# Altium PCB battery level meter.PcbDoc
Units mm, origin at the board's own origin, x right, y up, seen from the top; angles counter-clockwise.
Board outline 48.64 x 87.12 mm, 2 copper layers (Top Layer, Bottom Layer); 17 components, 17 nets, 51 pads, 0 vias.
Unrouted connection lines stored in the file: 2.
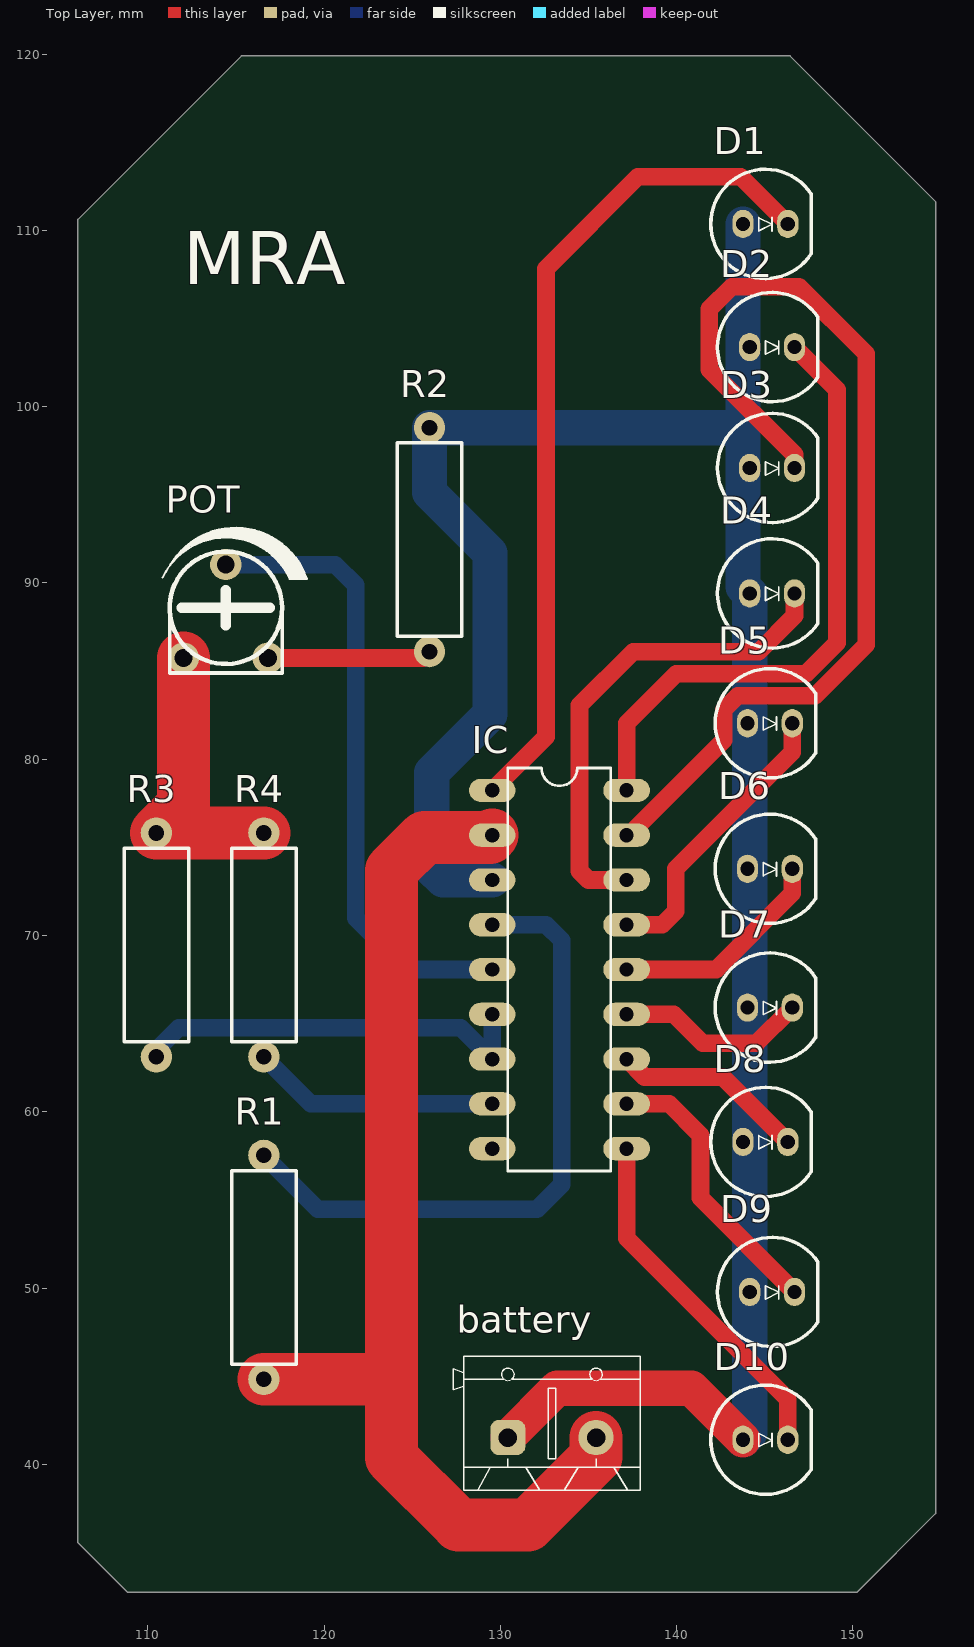
[diagram p0: Top Layer view]
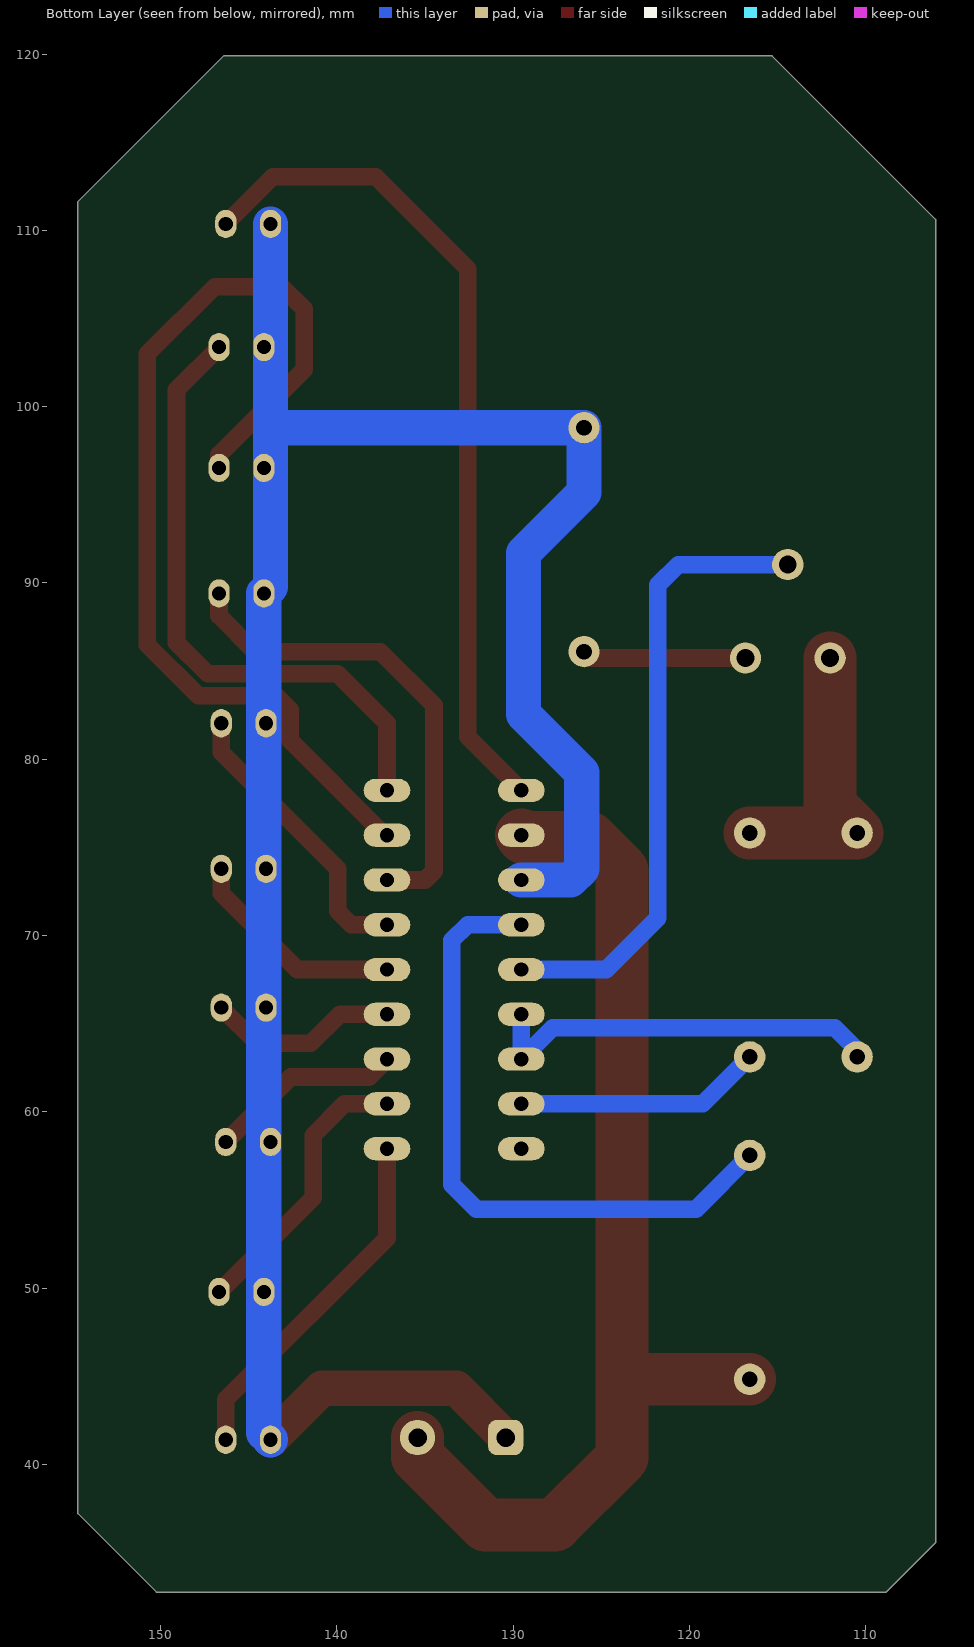
[diagram p1: Bottom Layer view, seen from below]
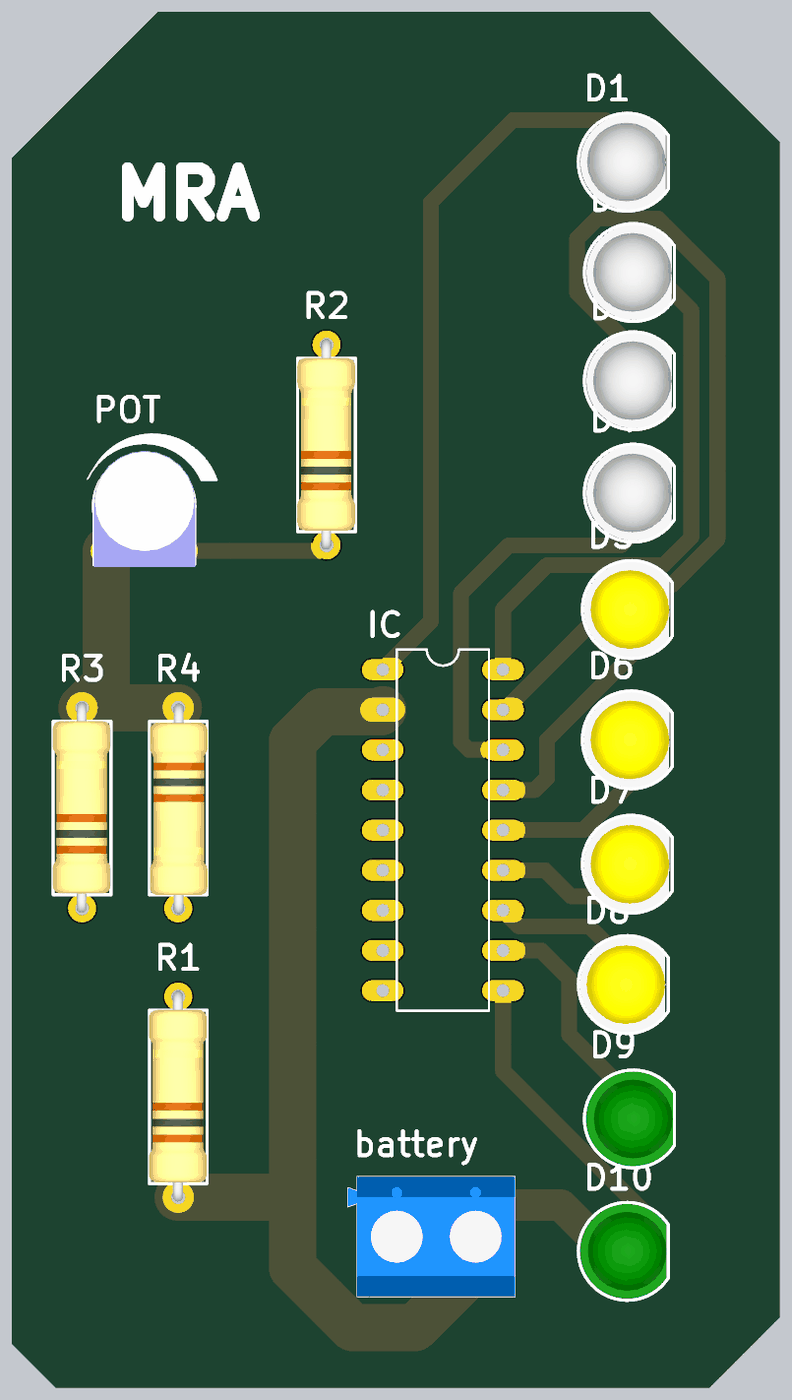
[diagram p2: 3D render of the assembled board from above, using the file's embedded part models]

## Layer stack, top to bottom
Top Solder: solder mask 0.0102, Solder Resist, Dk 3.5
Top Layer: signal copper 0.0356
Dielectric 1: dielectric 0.32, FR-4, Dk 4.8
Bottom Layer: signal copper 0.0356
Bottom Solder: solder mask 0.0102, Solder Resist, Dk 3.5

## Board outline
106.045,35.56 108.839,32.766 150.241,32.766 154.686,37.211 154.686,111.633 146.431,119.888 115.316,119.888 106.045,110.617

## Design rules (kind name [scope] priority, off if disabled: settings)
Clearance [All] p1: gap=0.254 ignorepadtopadclearanceinfootprint=FALSE except(0: Arc-Hole Track-Hole SMDPad-Hole THPad-Hole Via-Hole Fill-Hole Poly-Hole Region-Hole Text-Hole)
PolygonConnect [All] p1: connectstyle=Relief reliefconductorwidth=0.254 reliefentries=4 polygonreliefangle="90 Angle" airgapwidth=0.254
RoutingVias [All] p1: holewidth=0.711 width=1.27 viastyle="Through Hole" minholewidth=0.711 minwidth=1.27 maxholewidth=0.711 maxwidth=1.27
SolderMaskExpansion [All] p1: expansion=0.102
Width "Schematic Width Constraint_16" [InNet('NetD5_2')] p1: maxlimit=1 minlimit=1 preferedwidth=1
Width "Schematic Width Constraint_15" [InNet('NetD1_2')] p2: maxlimit=1 minlimit=1 preferedwidth=1
Width "Schematic Width Constraint_14" [InNet('NetIC_4')] p3: maxlimit=1 minlimit=1 preferedwidth=1
Width "Schematic Width Constraint_13" [InNet('NetIC_8')] p4: maxlimit=1 minlimit=1 preferedwidth=1
Width "Schematic Width Constraint_12" [InNet('NetD4_2')] p5: maxlimit=1 minlimit=1 preferedwidth=1
Width "Schematic Width Constraint_11" [InNet('NetPOT_2')] p6: maxlimit=1 minlimit=1 preferedwidth=1
Width "Schematic Width Constraint_10" [InNet('NetD2_2')] p7: maxlimit=1 minlimit=1 preferedwidth=1
Width "Schematic Width Constraint_9" [InNet('NetD8_2')] p8: maxlimit=1 minlimit=1 preferedwidth=1
Width "Schematic Width Constraint_8" [InNet('NetD6_2')] p9: maxlimit=1 minlimit=1 preferedwidth=1
Width "Schematic Width Constraint_7" [InNet('NetD10_2')] p10: maxlimit=1 minlimit=1 preferedwidth=1
Width "Schematic Width Constraint_6" [InNet('NetIC_6')] p11: maxlimit=1 minlimit=1 preferedwidth=1
Width "Schematic Width Constraint_5" [InNet('NetD7_2')] p12: maxlimit=1 minlimit=1 preferedwidth=1
Width "Schematic Width Constraint_4" [InNet('NetD3_2')] p13: maxlimit=1 minlimit=1 preferedwidth=1
Width "Schematic Width Constraint_3" [InNet('NetD9_2')] p14: maxlimit=1 minlimit=1 preferedwidth=1
Width "Schematic Width Constraint_2" [InNet('NetIC_5')] p15: maxlimit=1 minlimit=1 preferedwidth=1
Width "Schematic Width Constraint_1" [InNet('GND')] p16: maxlimit=3 minlimit=3 preferedwidth=3
Width "Schematic Width Constraint" [InNet('VCC')] p17: maxlimit=2 minlimit=2 preferedwidth=2
Width [All] p18: maxlimit=0.254 minlimit=0.254 preferedwidth=0.254
30 further rules are at their usual default settings.

## Components (designator, comment, footprint, x,y, rotation, side; value= is the part's Value field where it differs from the comment)
battery "KF301_Terminal" "KF301 2PIN" 132.929,41.529 r0 top
D1 "LED 5MM" LED5MM_RED 145.034,110.363 r0 top
D2 "LED 5MM" LED5MM_RED 145.415,103.378 r0 top
D3 "LED 5MM" LED5MM_RED 145.415,96.52 r0 top
D4 "LED 5MM" LED5MM_RED 145.415,89.408 r0 top
D5 "LED 5MM" LED5MM_YELLOW 145.288,82.042 r0 top
D6 "LED 5MM" LED5MM_YELLOW 145.288,73.787 r0 top
D7 "LED 5MM" LED5MM_YELLOW 145.288,65.913 r0 top
D8 "LED 5MM" LED5MM_YELLOW 145.034,58.293 r0 top
D9 "LED 5MM" LED5MM_GRN 145.415,49.784 r0 top
D10 "LED 5MM" LED5MM_GRN 145.034,41.402 r0 top
IC "LM3914N" DIL18 133.35,68.072 r270 top
POT "10K" "POT 4" 114.427,88.392 r0 top
R1 "14K" RES-(1/1) 116.586,44.831 r90 top
R2 "7K" RES-(1/1) 125.984,86.106 r90 top
R3 "18K" RES-(1/1) 110.49,63.119 r90 top
R4 "4K" RES-(1/1) 116.586,75.819 r270 top

## Footprints (in the part's own frame and the unit in brackets; to place one, negate y for a bottom-side part, rotate by r counter-clockwise, add the part's x,y. Pads: shape width x height; smd on the part's side, far side on the other; paste and mask are expansions set on the pad)
DIL18 [mil]
  oval 52x104 hole 32: 1(-400,-150) 2(-300,-150) 3(-200,-150) 4(-100,-150) 5(0,-150) 6(100,-150) 7(200,-150) 8(300,-150) 9(400,-150) 10(400,150) 11(300,150) 12(200,150) 13(100,150) 14(0,150) 15(-100,150) 16(-200,150) 17(-300,150) 18(-400,150)
  silkscreen extent -450,-115 450,115
"KF301 2PIN" [mm] "Designer Abbas Basereh"
  rrect50% 2x2 hole 1.05: 1(-2.5,0)
  round 2 hole 1.05: 2(2.5,0)
  silkscreen extent -5.6,-3 5,4.6, body extent -5.6,-3 5,4.6, height 10
LED5MM_GRN [mm] "LED 5MM THROUGH HOLE GREEN-Designer Abbas Basereh"
  oval 1.2x1.6 hole 0.8: 1(-1.27,0) 2(1.27,0)
  silkscreen extent -3.1,-3.1 2.6,3.1, body extent -3,-3 2.5,3, height 9.14
LED5MM_RED [mm] "LED 5MM THROUGH HOLE RED-Designer Abbas Basereh"
  oval 1.2x1.6 hole 0.8: 1(-1.27,0) 2(1.27,0)
  silkscreen extent -3.1,-3.1 2.6,3.1, body extent -2.97,-3 2.45,3.02, height 12.31
LED5MM_YELLOW [mm] "LED 5MM THROUGH HOLE YELLOW-Designer Abbas Basereh"
  oval 1.2x1.6 hole 0.8: 1(-1.27,0) 2(1.27,0)
  silkscreen extent -3.1,-3.1 2.6,3.1, body extent -3,-3.01 2.42,3.01, height 12.31
"POT 4" [mil] "Trimmer"
  round 70 hole 40: 1(-94.49,-104.33) 2(94.49,-104.33) 3(0,104.33)
  silkscreen extent -141,-138 181,187, body extent -125,-144 127,145, height 187
RES-(1/1) [mil]
  round 70 hole 35: 1(0,0) 2(500,0)
  silkscreen extent 34,-72 466,72, body extent -11,-71 514,73, height 151

## Part data
battery: library part KF301-2Pin_Terminal, "Terminal 2 Pin 250VAC 16A", Designer="Abbas Basereh", Link=https://www.aliexpress.com/item/, Part. No="KF301 2P"
D1 D2 D3 D4 D5 D6 D7 D8 D9 D10: "Light Emitting Diode", Data=16-12-2016, Designer="Abbas Basereh"
IC: "LED Lighting Drivers", Package=None, Availability=Unavailable, MF="Texas Instruments", MP=LM3914N, Price=None, SnapEDA_Link=https://www.snapeda.com/parts/LM3914N/Texas%20Instruments/view-part/4652973/?ref=snap
POT: library part POT, "Variable Resistor"
R1 R2 R3 R4: library part "RES DIP PACKAGE", "TOTAL DIP RESISTOR PACK", Designer="Ali Hafizi"

## Nets (pads, with @x,y where several pads share a name; then routed paths per layer and width w, separated by ;. In a path a pad name is that pad's centre, name@x,y a point inside that pad or via, vN(x,y) a via of type N, cw(c..) or ccw(c..) an arc to the next point about the centre after c; other vN are vias at no path point)
GND: battery.2 IC.2 POT.1 R1.1 R3.2 R4.1 | length 79.7
  Top Layer w3: POT.1 112.027,77.356 R3.2 R4.1 ; R1.1 123.698,44.831 123.825,44.958 ; IC.2 129.414,75.566 125.699,75.566 123.825,73.693 123.825,44.958 ; battery.2 135.429,40.433 131.572,36.576 127.635,36.576 123.825,40.386 123.825,44.958
NetD1_2: D1.2 IC.1 | length 47.8
  Top Layer w1: IC.1 132.588,81.28 132.588,107.823 137.795,113.03 143.637,113.03 D1.2
NetD2_2: D2.2 IC.18 | length 35.4
  Top Layer w1: IC.18 137.16,82.042 139.968,84.85 147.334,84.85 149.098,86.614 149.098,100.965 D2.2
NetD3_2: D3.2 IC.17 | length 57.6
  Top Layer w1: IC.17 137.281,75.692 142.664,81.075 142.664,82.803 143.457,83.596 147.853,83.596 150.749,86.492 150.749,102.997 146.939,106.807 143.129,106.807 141.859,105.537 141.859,102.108 146.685,97.282 D3.2
NetD4_2: D4.2 IC.16 | length 27.8
  Top Layer w1: IC.16 135.001,73.152 134.493,73.66 134.493,83.058 137.541,86.106 144.653,86.106 146.685,88.138 D4.2
NetD5_2: D5.2 IC.15 | length 16.5
  Top Layer w1: IC.15 139.192,70.612 139.954,71.374 139.954,73.787 146.558,80.391 D5.2
NetD6_2: D6.2 IC.14 | length 12.6
  Top Layer w1: IC.14 142.24,68.072 146.558,72.39 D6.2
NetD7_2: D7.2 IC.13 | length 10.9
  Top Layer w1: IC.13 139.827,65.532 141.478,63.881 144.526,63.881 D7.2
NetD8_2: D8.2 IC.12 | length 11.1
  Top Layer w1: IC.12 138.176,61.976 142.621,61.976 D8.2
NetD9_2: D9.2 IC.11 | length 16
  Top Layer w1: IC.11 139.573,60.452 141.351,58.674 141.351,55.118 D9.2
NetD10_2: D10.2 IC.10 | length 20.3
  Top Layer w1: IC.10 137.16,52.832 146.304,43.688 D10.2
NetIC_4: IC.4 R1.2 | length 36.9
  Bottom Layer w1: R1.2 119.634,54.483 132.08,54.483 133.477,55.88 133.477,69.723 132.588,70.612 IC.4
NetIC_5: IC.5 POT.3 | length 35.7
  Bottom Layer w1: POT.3 120.633,91.042 121.793,89.882 121.793,70.993 124.714,68.072 IC.5
NetIC_6: IC.6 IC.7 R3.1 | length 23.2
  Bottom Layer w1: R3.1 110.49,63.5 111.76,64.77 127.762,64.77 IC.7 IC.6
NetIC_8: IC.8 R4.2 | length 14.1
  Bottom Layer w1: R4.2 119.253,60.452 IC.8
NetPOT_2: POT.2 R2.1 | length 9.3
  Top Layer w1: POT.2 125.62,85.742 R2.1
VCC: battery.1 D1.1 D2.1 D3.1 D4.1 D5.1 D6.1 D7.1 D8.1 D9.1 D10.1 IC.3 IC.9 R2.2 | length 134.4
  Top Layer w2: battery.1 133.223,44.323 140.843,44.323 D10.1
  Bottom Layer w2: IC.3 126.746,73.152 126.111,73.787 126.111,79.248 129.413,82.55 129.413,91.694 125.984,95.123 R2.2 143.51,98.806 143.764,98.552 ; D10.1 144.145,41.783 D9.1 144.145,82.042 D4.1 143.764,89.789 143.764,98.552 ; D1.1 143.764,98.552

## Silkscreen, mask and mechanical layers (free items; w line width, h text height)
Top Overlay:
  text "MRA" at 112.014,106.934 h3
Mechanical 13:
  lines w0.025: 106.045,35.56 106.045,110.617 115.316,119.888 143.002,119.888 146.431,119.888 154.686,111.633 154.686,37.211 150.241,32.766 108.839,32.766 106.045,35.56